# EAGLE board ruido_v2_led (EAGLE 5.06)
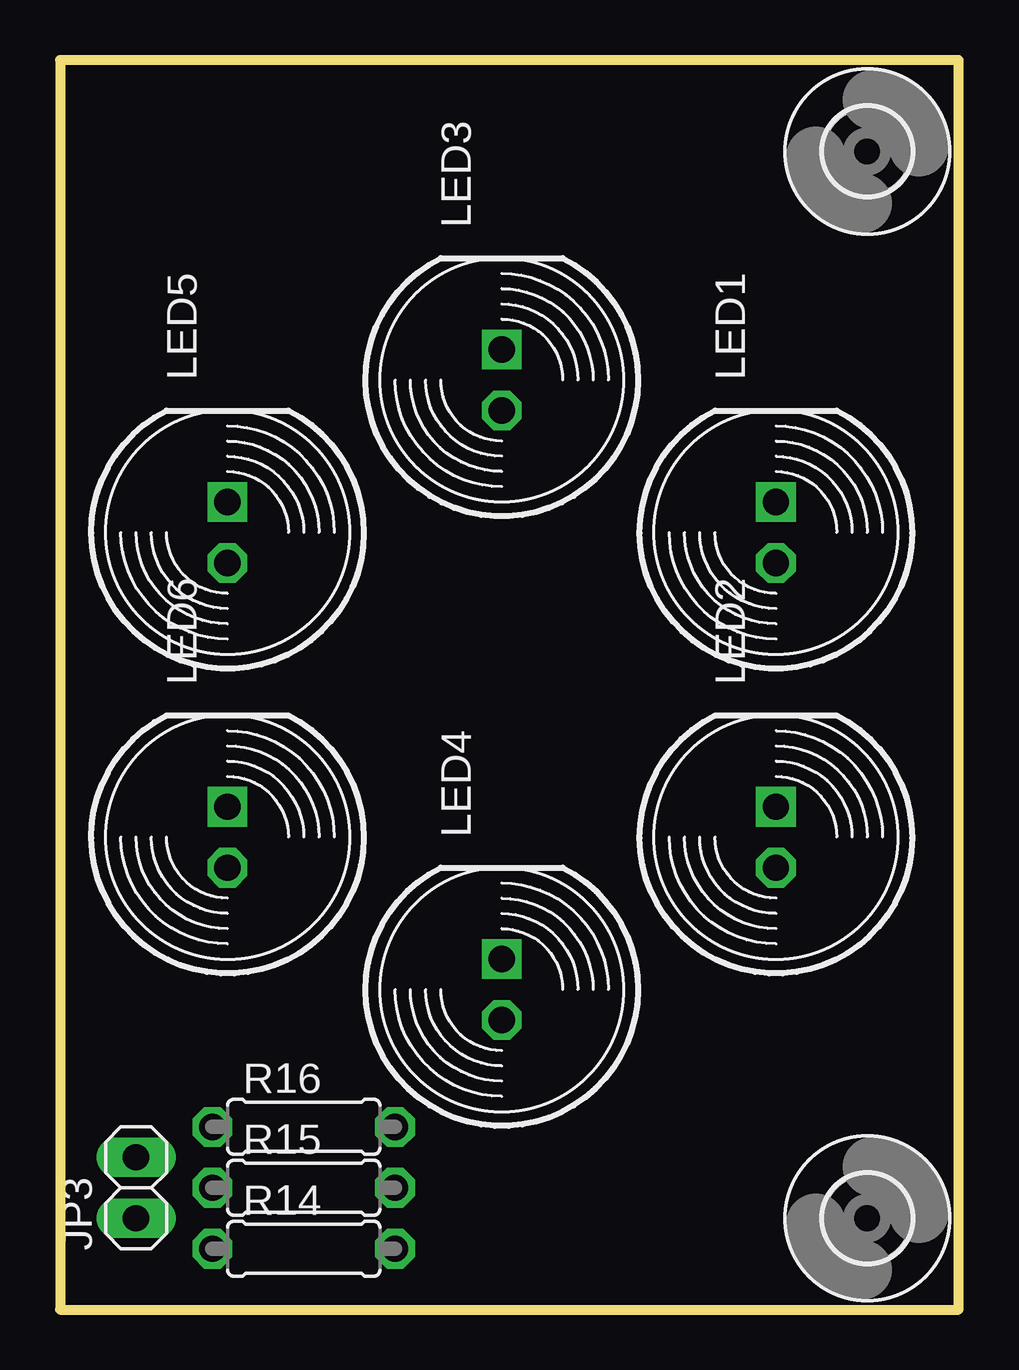
[diagram p0: board, top side]
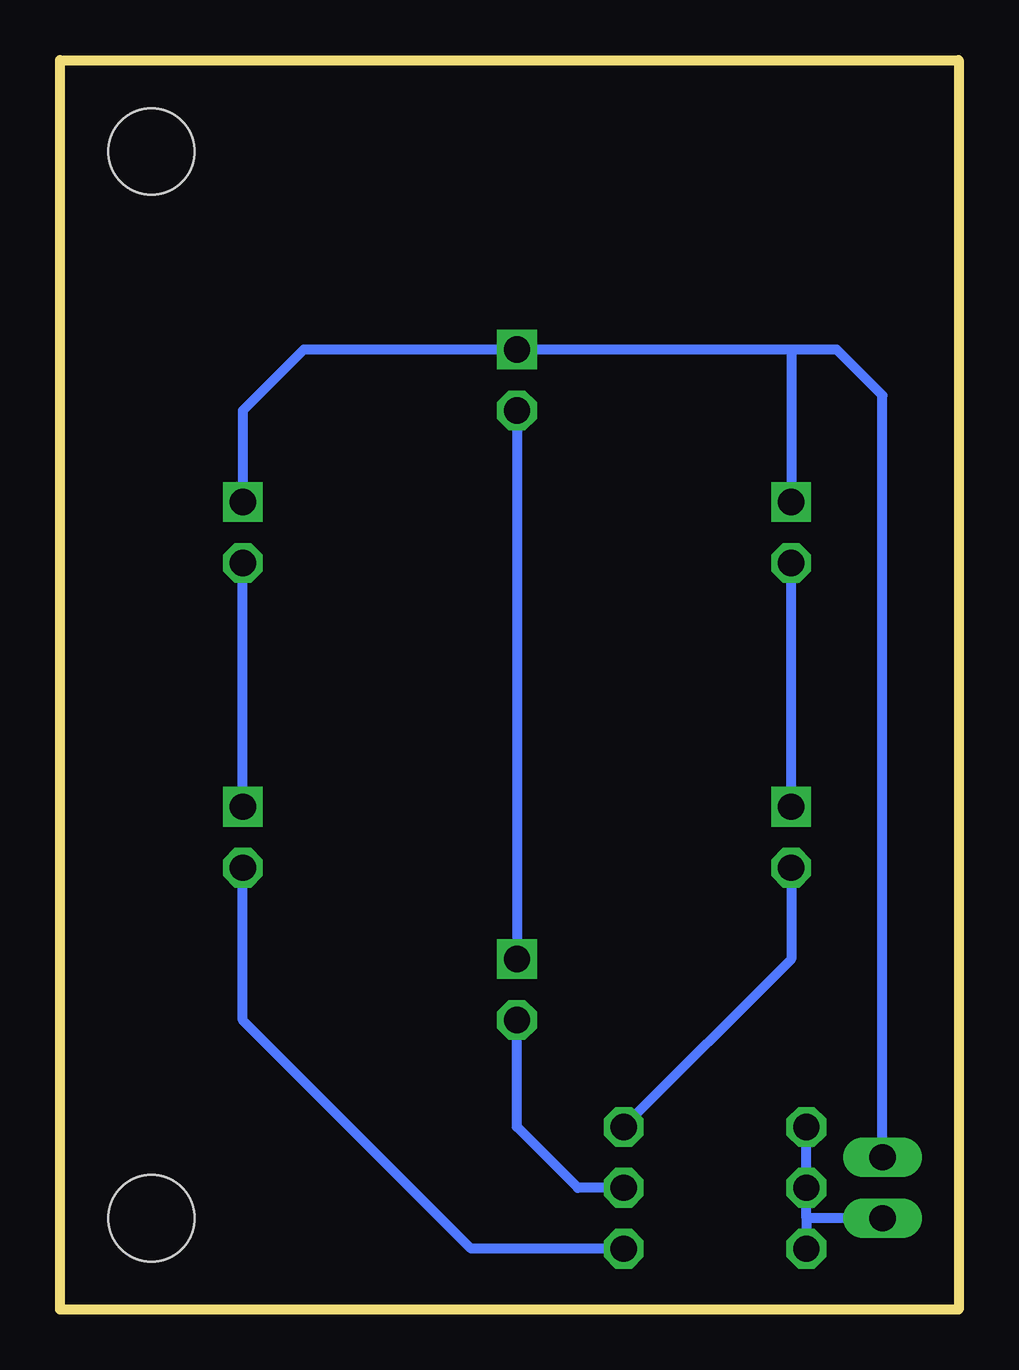
[diagram p1: board, bottom side, seen from below]

Size 37.47 x 52.07 mm. Coordinates in mm from the lower left corner, seen from the top.
Outline: 0,0 37.47,0 37.47,52.07 0,52.07 0,0
Copper layers (1*16): Top 0.035mm / dielectric 1.5mm / Bottom 0.035mm
Design rules "default": minimum track width 10mil, minimum drill 24mil, track to track 8mil, track to pad 8mil, pad to pad 8mil, via to via 8mil, smd to smd 8mil, copper to edge 40mil, drill to drill 8mil, minimum pad ring 10mil, minimum via ring 8mil, stop-mask expansion 4mil, vias tented up to drill 0mil, thermal gap 10mil

## Footprints (pad centres in the part's own frame; a part is rotated, then mirrored left to right if it is on the bottom)
1X02 = drill 1.1 long: 1 -1.27,0; 2 1.27,0
LED10MM = drill 1.1 octagon: A -1.27,0 | drill 1.1 square: K 1.27,0
0207/7 = drill 1.1 octagon: 1 -3.81,0; 2 3.81,0
3,6 = hole 3.6: 0,0

## Placement (x,y rotation side)
JP3  [1X02]  3.17,5.08 90 top
LED1  [LED10MM]  29.84,32.38 90 top
LED2  [LED10MM]  29.84,19.68 90 top
LED3  [LED10MM]  18.41,38.73 90 top
LED4  [LED10MM]  18.41,13.34 90 top
LED5  [LED10MM]  6.99,32.38 90 top
LED6  [LED10MM]  6.99,19.68 90 top
R14  470  [0207/7]  10.16,2.54 0 top
R15  470  [0207/7]  10.16,5.08 0 top
R16  470  [0207/7]  10.16,7.62 0 top
U$3  [3,6]  33.66,3.81 0 top
U$4  [3,6]  33.66,48.26 0 top

## Library data of the parts
JP3 LED1-LED6 R14-R16 U$3 U$4 = ruido

## Nets
5V+: JP3.1 R14.1 R15.1 R16.1
GND: JP3.2 LED1.K LED3.K LED5.K
N$19: LED1.A LED2.K
N$20: LED5.A LED6.K
N$21: LED3.A LED4.K
N$22: LED2.A R14.2
N$25: LED4.A R15.2
N$26: LED6.A R16.2

## Tracks (layer width: path | path; a pad name or v marks a point on that pad's centre or on a via)
5V+
  Bottom 0.406: JP3.1 6.35,3.81 | 6.35,3.81 R14.1 | 6.35,3.81 R15.1 R16.1
GND
  Bottom 0.406: LED1.K 29.84,37.47 27.3,40.01 LED3.K 6.99,40.01 | JP3.2 3.17,38.1 5.08,40.01 6.99,40.01 | 6.99,40.01 LED5.K
N$19
  Bottom 0.406: LED2.K LED1.A
N$20
  Bottom 0.406: LED6.K LED5.A
N$21
  Bottom 0.406: LED3.A LED4.K
N$22
  Bottom 0.406: R14.2 20.32,2.54 29.84,12.06 LED2.A
N$25
  Bottom 0.406: R15.2 15.88,5.08 18.41,7.62 LED4.A
N$26
  Bottom 0.406: LED6.A 6.99,14.61 R16.2